# Altium PCB ESP8266.PcbDoc
Units mil, origin at the board's own origin, x right, y up, seen from the top; angles counter-clockwise.
Board outline 6000 x 4000 mil, 2 copper layers (Top Layer, Bottom Layer); 37 components, 27 nets, 194 pads, 10 vias.
Unrouted connection lines stored in the file: 56.
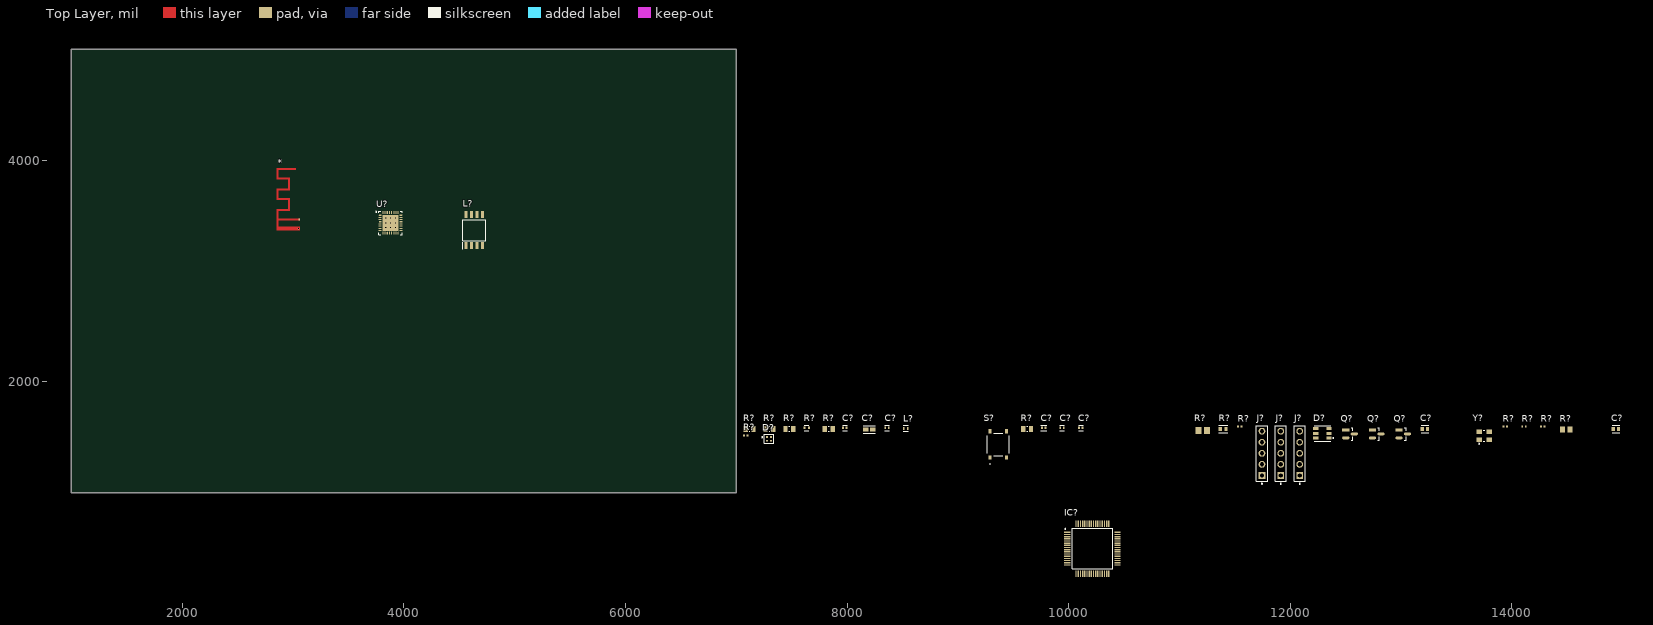
[diagram p0: Top Layer view]
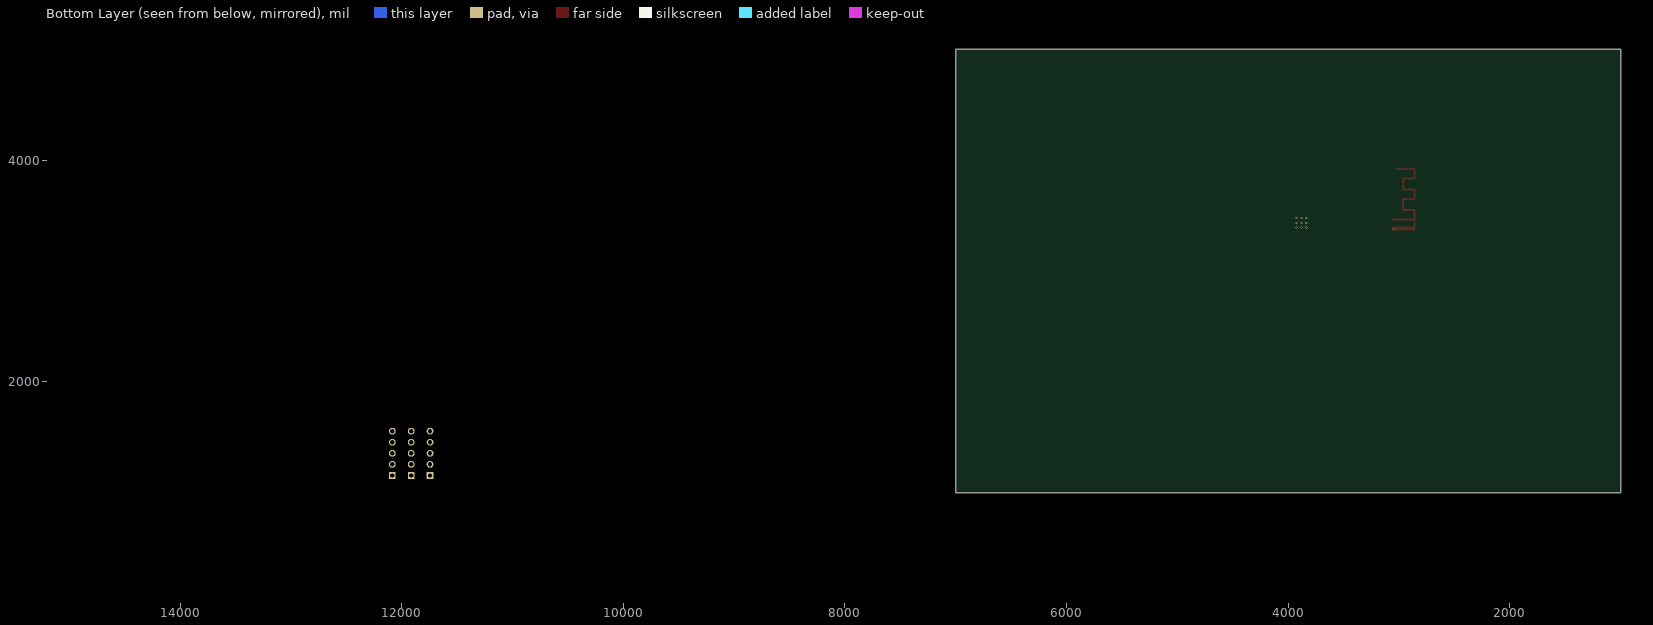
[diagram p1: Bottom Layer view, seen from below]

## Layer stack, top to bottom
Top Solder: solder mask 0.4, Solder Resist, Dk 3.5
Top Layer: signal copper 1.4
Dielectric 1: dielectric 12.6, FR-4, Dk 4.8
Bottom Layer: signal copper 1.4
Bottom Solder: solder mask 0.4, Solder Resist, Dk 3.5

## Board outline
1000,1000 7000,1000 7000,5000 1000,5000

## Design rules (kind name [scope] priority, off if disabled: settings)
Clearance [All] p1: gap=10 ignorepadtopadclearanceinfootprint=FALSE
PolygonConnect [All] p1: connectstyle=Relief reliefconductorwidth=10 reliefentries=4 polygonreliefangle="90 Angle" airgapwidth=10
RoutingVias [All] p1: holewidth=28 width=50 viastyle="Through Hole" minholewidth=28 minwidth=50 maxholewidth=28 maxwidth=50
SolderMaskExpansion [All] p1: expansion=4 istentingtop=FALSE
SupplyNets "Schematic Supply Nets_2" [InNet('+5')] p1: voltage=0.000
SupplyNets "Schematic Supply Nets_1" [InNet('+3,3')] p2: voltage=0.000
SupplyNets "Schematic Supply Nets" [InNet('GND')] p3: voltage=0.000
Width [All] p1: maxlimit=10 minlimit=10 preferedwidth=10
30 further rules are at their usual default settings.

## Classes and differential pairs
component class ESP8266: * D? IC? J? Q? R? S? U? Y?

## Components (designator, comment, footprint, x,y, rotation, side; value= is the part's Value field where it differs from the comment)
* "RF_ESP8266" PCBComponent_1 3049.52,3382.39 r90 top
C? "GRM155R71C104KA88D" FP-GRM15-MFG 7980,1585 r0 top value=0.10μF
C? "C0603C100C5GACTU" FP-C0603C-CF-MFG 13215,1575 r0 top value="10 pF"
C? "C0402C105K8PACTU" FP-C0402C105K8PACTU-MFG 9775,1585 r0 top
C? "GRM155R71C104KA88D" FP-GRM15-MFG 8360,1585 r0 top value=0.10μF
C? "C0603C100C5GACTU" FP-C0603C-CF-MFG 14940,1575 r0 top value="10 pF"
C? "GRM188R60J106ME47D" FP-GRM188-0_1-e0_2_0_55-IPC_A 8200,1570 r0 top
C? "GRM155R71C104KA88D" FP-GRM15-MFG 10110,1585 r0 top value=0.10μF
C? "GRM155R71C104KA88D" FP-GRM15-MFG 9940,1585 r0 top value=0.10μF
D? "SML-LX0404SIUPGUSB" FP-SML-LX0404SIUPGUSB-MFG 7295,1485 r0 top
D? "150353M153300" WL-SFTD_3535 12290,1535 r0 top
IC? "STM32H7A3RIT6" QFP50P1200X1200X160-64N 10215,495 r0 top
J? "90120-0125" FP-90120-0125-MFG 11745,1355 r90 top
J? "90120-0125" FP-90120-0125-MFG 11915,1355 r90 top
J? "90120-0125" FP-90120-0125-MFG 12085,1355 r90 top
L? "W25Q128JVSIQ_TR" SOIC127P780X195-8N 4635,3370 r90 top
L? "LQW15AN4N3C00D" FP-LQW15AN_00-W0_6-0_1-MFG 8530,1580 r0 top
Q? "MMBT2222A-7-F" FP-SOT23-IPC_A 12780,1530 r0 top
Q? "MMBT2222A-7-F" FP-SOT23-IPC_A 12540,1530 r0 top
Q? "MMBT2222A-7-F" FP-SOT23-IPC_A 13020,1530 r0 top
R? "ERJ-2GEJ221X" RESC1005X40X25LL05T05 7085,1515 r0 top
R? "RC0805FR-0710KL" RESC2013X60X35NL10T20 7835,1575 r0 top
R? "ERJ-3EKF2000V" FP-ERJ3EK-IPC_C 11395,1575 r0 top
R? "ERT-J0ET102J" RESC1005X40X25LL05T05 14110,1595 r0 top
R? "RC0805FR-0710KL" RESC2013X60X35NL10T20 7300,1575 r0 top
R? "ERT-J0ET102J" RESC1005X40X25LL05T05 14280,1595 r0 top
R? "ERJ-2RKF1000X" RESC1005X40X25LL05T05 11545,1595 r0 top
R? "ERJ6ENF1202V" RESC2013X70X40ML20T20 11210,1560 r0 top
R? "RC0805FR-0710KL" RESC2013X60X35NL10T20 7120,1575 r0 top
R? "ERJ6ENF2200V" RESC2013X70X40NL20T20 14490,1570 r0 top
R? "RC0805FR-0710KL" RESC2013X60X35NL10T20 7480,1575 r0 top
R? "ERT-J0ET102J" RESC1005X40X25LL05T05 13940,1595 r0 top
R? "RC0805FR-0710KL" RESC2013X60X35NL10T20 9625,1575 r0 top
R? "ERJ-2RKF4990X" FP-ERJ2RK-MFG 7635,1585 r0 top
S? "TS-1187A-B-A-B" TS1187ABAB 9365,1435 r90 top
U? "ESP8266EX" ESFS-QFN-32_L 3880,3435 r0 top
Y? "ABM8-26.000MHZ-B2-T" ABM810000MHZ12D2W 13750,1515 r0 top

## Footprints (in the part's own frame and the unit in brackets; to place one, negate y for a bottom-side part, rotate by r counter-clockwise, add the part's x,y. Pads: shape width x height; smd on the part's side, far side on the other; paste and mask are expansions set on the pad)
ABM810000MHZ12D2W [mm]
  rect 1.3x1.05 smd: 1(-1.15,-0.925) 2(1.15,-0.925) 3(1.15,0.925) 4(-1.15,0.925)
  silkscreen extent -1.25,-1.95 0.2,1.25, body extent -1.6,-1.25 1.6,1.25, height 0.8
ESFS-QFN-32_L [mm] "QFN, 32-Leads, Body 5.05x5.05mm, Pitch 0.50mm, Thermal Pad 3.70x3.70mm, IPC High Density"
  oval 0.7x0.25 smd: 1(-2.375,1.75) 2(-2.375,1.25) 3(-2.375,0.75) 4(-2.375,0.25) 5(-2.375,-0.25) 6(-2.375,-0.75) 7(-2.375,-1.25) 8(-2.375,-1.75) 17(2.375,-1.75) 18(2.375,-1.25) 19(2.375,-0.75) 20(2.375,-0.25) 21(2.375,0.25) 22(2.375,0.75) 23(2.375,1.25) 24(2.375,1.75)
  oval 0.25x0.7 smd: 9(-1.75,-2.375) 10(-1.25,-2.375) 11(-0.75,-2.375) 12(-0.25,-2.375) 13(0.25,-2.375) 14(0.75,-2.375) 15(1.25,-2.375) 16(1.75,-2.375) 25(1.75,2.375) 26(1.25,2.375) 27(0.75,2.375) 28(0.25,2.375) 29(-0.25,2.375) 30(-0.75,2.375) 31(-1.25,2.375) 32(-1.75,2.375)
  rect 3.7x3.7 smd: 33(0,0)
  silkscreen extent -3.45,-2.67 2.68,2.68, body extent -2.52,-2.52 2.53,2.53, height 0.9
FP-90120-0125-MFG [mm]
  rect 1.55x1.55 hole 1 paste-2539.97 mask+0: 1(-5.08,0)
  round 1.55 hole 1 paste-2539.97 mask+0: 2(-2.54,0) 3(0,0) 4(2.54,0) 5(5.08,0)
  silkscreen extent -7.07,-1.27 6.35,1.27, body extent -6.45,-1.37 6.45,1.37, height 0.25
FP-C0402C105K8PACTU-MFG [mm]
  rect 0.52x0.52 smd paste+0 mask+0: 1(-0.4,0) 2(0.4,0)
  silkscreen extent -0.67,-0.64 0.67,0.64, body extent -0.8,-0.4 0.8,0.4, height 0.25
FP-C0603C-CF-MFG [mm]
  rect 0.75x0.9 smd paste+0 mask+0: 1(-0.6,0) 2(0.6,0)
  silkscreen extent -0.87,-0.85 0.88,0.85, body extent -1.2,-0.6 1.2,0.6, height 0.25
FP-ERJ2RK-MFG [mm]
  rect 0.475x0.5 smd paste+0 mask+0: 1(-0.513,0) 2(0.513,0)
  silkscreen extent -0.53,-0.63 0.53,0.63, body extent -0.85,-0.38 0.85,0.38, height 0.25
FP-ERJ3EK-IPC_C [mil]
  rect 29.78x33.94 smd paste+0 mask+0: 1(-25.62,0) 2(25.62,0)
  silkscreen extent -41,-34 41,34, body extent -44,-23 44,23, height 10
FP-GRM15-MFG [mm]
  rect 0.4x0.5 smd paste+0 mask+0: 1(-0.4,0) 2(0.4,0)
  silkscreen extent -0.53,-0.63 0.53,0.63, body extent -0.7,-0.38 0.7,0.38, height 0.25
FP-GRM188-0_1-e0_2_0_55-IPC_A [mil]
  rect 47.57x39.85 smd paste+0 mask+0: 1(-31.57,0) 2(31.57,0)
  silkscreen extent -55,-36 55,36, body extent -75,-40 75,40, height 10
FP-LQW15AN_00-W0_6-0_1-MFG [mm]
  rect 0.35x0.65 smd paste+0 mask+0: 1(-0.425,0) 2(0.425,0)
  silkscreen extent -0.55,-0.7 0.55,0.7, body extent -0.7,-0.45 0.7,0.45, height 0.25
FP-SML-LX0404SIUPGUSB-MFG [mm]
  rect 0.45x0.45 smd paste+0 mask+0: 1(-0.425,0.425) 2(0.425,0.425) 3(0.425,-0.425) 4(-0.425,-0.425)
  silkscreen extent -1.67,-1.05 1.05,1.05, body extent -0.85,-0.85 0.85,0.85, height 0.25
FP-SOT23-IPC_A [mm]
  rect 1.659x0.627 smd paste+0 mask+0: 1(-0.977,0.915)
  rrect100% 1.659x0.627 smd paste+0 mask+0: 2(-0.977,-0.915) 3(0.977,0)
  silkscreen extent 0.23,-1.45 0.65,1.45, body extent -2.31,-1.95 2.31,1.95, height 0.25
PCBComponent_1 [mil]
  rect 19.7x15 smd: 5(82.61,-5.48)
  Top Layer region: 72.8,-12.9 92.5,-12.9 92.5,180 72.8,180
  Top Layer region: 529.2,24.8 548.9,24.8 548.9,180 529.2,180
  Top Layer region: 442.6,180 548.9,180 548.9,199.7 442.6,199.7
  Top Layer region: 442.6,76.1 462.3,76.1 462.3,180 442.6,180
  Top Layer region: 363.9,76.1 442.6,76.1 442.6,95.8 363.9,95.8
  Top Layer region: 344.2,76.1 363.9,76.1 363.9,180 344.2,180
  Top Layer region: 257.6,180 363.9,180 363.9,199.7 257.6,199.7
  Top Layer region: 257.6,76.1 277.3,76.1 277.3,180 257.6,180
  Top Layer region: 159.2,76.1 178.9,76.1 178.9,180 159.2,180
  Top Layer region: 178.9,76.1 257.6,76.1 257.6,95.8 178.9,95.8
  Top Layer region: -17.7,180 178.9,180 178.9,199.7 -17.7,199.7
  Top Layer region: -17.7,-12.9 17.7,-12.9 17.7,180 -17.7,180
QFP50P1200X1200X160-64N [mm]
  rect 1.475x0.3 smd: 1(-5.738,3.75) 2(-5.738,3.25) 3(-5.738,2.75) 4(-5.738,2.25) 5(-5.738,1.75) 6(-5.738,1.25) 7(-5.738,0.75) 8(-5.738,0.25) 9(-5.738,-0.25) 10(-5.738,-0.75) 11(-5.738,-1.25) 12(-5.738,-1.75) 13(-5.738,-2.25) 14(-5.738,-2.75) 15(-5.738,-3.25) 16(-5.738,-3.75) 33(5.738,-3.75) 34(5.738,-3.25) 35(5.738,-2.75) 36(5.738,-2.25) 37(5.738,-1.75) 38(5.738,-1.25) 39(5.738,-0.75) 40(5.738,-0.25) 41(5.738,0.25) 42(5.738,0.75) 43(5.738,1.25) 44(5.738,1.75) 45(5.738,2.25) 46(5.738,2.75) 47(5.738,3.25) 48(5.738,3.75)
  rect 0.3x1.475 smd: 17(-3.75,-5.738) 18(-3.25,-5.738) 19(-2.75,-5.738) 20(-2.25,-5.738) 21(-1.75,-5.738) 22(-1.25,-5.738) 23(-0.75,-5.738) 24(-0.25,-5.738) 25(0.25,-5.738) 26(0.75,-5.738) 27(1.25,-5.738) 28(1.75,-5.738) 29(2.25,-5.738) 30(2.75,-5.738) 31(3.25,-5.738) 32(3.75,-5.738) 49(3.75,5.738) 50(3.25,5.738) 51(2.75,5.738) 52(2.25,5.738) 53(1.75,5.738) 54(1.25,5.738) 55(0.75,5.738) 56(0.25,5.738) 57(-0.25,5.738) 58(-0.75,5.738) 59(-1.25,5.738) 60(-1.75,5.738) 61(-2.25,5.738) 62(-2.75,5.738) 63(-3.25,5.738) 64(-3.75,5.738)
  silkscreen extent -6.35,-4.65 4.65,4.65, body extent -6,-6 6,6, height 1.6
RESC1005X40X25LL05T05 [mm] "Chip Resistor, 2-Leads, Body 1.05x0.55mm, IPC High Density"
  rect 0.45x0.45 smd: 1(-0.4,0) 2(0.4,0)
  body extent -0.53,-0.28 0.53,0.28, height 0.4
RESC2013X60X35NL10T20 [mm] "Chip Resistor, 2-Leads, Body 2.1x1.35mm, IPC Medium Density"
  rect 1x1.35 smd: 1(-0.9,0) 2(0.9,0)
  silkscreen extent -0.1,-0.58 0.1,0.58, body extent -1.05,-0.68 1.05,0.67, height 0.6
RESC2013X70X40ML20T20 [mm] "Chip Resistor, 2-Leads, Body 2.00x1.25mm, IPC Low Density"
  rect 1.35x1.55 smd: 1(-0.975,0) 2(0.975,0)
  body extent -1.1,-0.72 1.1,0.72, height 0.7
RESC2013X70X40NL20T20 [mm] "Chip Resistor, 2-Leads, Body 2.00x1.25mm, IPC Medium Density"
  rect 1.15x1.45 smd: 1(-0.875,0) 2(0.875,0)
  body extent -1.1,-0.72 1.1,0.72, height 0.7
SOIC127P780X195-8N [mm]
  rect 1.6x0.65 smd: 1(-3.55,1.905) 2(-3.55,0.635) 3(-3.55,-0.635) 4(-3.55,-1.905) 5(3.55,-1.905) 6(3.55,-0.635) 7(3.55,0.635) 8(3.55,1.905)
  silkscreen extent -4.35,-2.62 2.4,2.62, body extent -3.9,-2.62 3.9,2.62, height 1.95
TS1187ABAB [mm]
  rect 1x0.75 smd: A1(-3,1.875) B1(3,1.875) C1(-3,-1.875) D1(3,-1.875)
  silkscreen extent -4.5,-2.55 2.55,2.55, body extent -3.2,-2.55 3.3,2.55, height 1.5
WL-SFTD_3535 [mm] "SMD Full-color Top LED Diffused, body 3.7x3.5mm"
  rect 1.2x0.7 smd: 1(-1.5,1.075) 2(1.5,1.075) 3(-1.5,0) 4(1.5,0) 5(-1.5,-1.075) 6(1.5,-1.075)
  silkscreen extent -1.9,-1.8 2.63,1.8, body extent -1.85,-1.75 1.85,1.75, height 2.8

## Part data
*: library part CMP-00025-00004-2
C? C? C? C?: library part CMP-2100-03641-2, "CAP CER 0.1UF 16V X7R 0402", Capacitance=0.10μF, Manufacturer=Murata, Package=GRM15, Temperature="-55°C to +125°C", Temperature Characteristic=X7R, Temperature Range High=+125°C, Temperature Range Low=-55°C, Tolerance=10%, Voltage Rating=16Vdc, Category=Cap, ComponentLink2Description=Datasheet, ComponentLink2URL=https://search.murata.co.jp/Ceramy/image/img/A01X/G101/ENG/GRM155R71H471KA01-01A.pdf, Device Class L1="Passive Components", Device Class L2=Capacitors, Device Class L3="Ceramic Capacitors", Digikey Description="CAP CER 0.1UF 16V X7R 0402", Height=0.55mm, Ipc Land Pattern Name=CAPC10050X219, Lead Free=yes, Manufacturer Part Number=GRM155R71C104KA88D, Material=Ceramic, Mouser Description="0402 0.1 uF 16V ±10 % Tolerance X7R SMT Multilayer Ceramic Capacitor", Octopart=https://octopart.com/grm155r71c104ka88d-murata-196880, RoHS=TRUE, Standoff Height=0mm
C? C?: library part CMP-2006-03343-2, "CAP CER 10PF 50V NP0 0603", Capacitance="10 pF", Manufacturer=KEMET, Package=C0603C-CF, Temperature="-55°C to +125°C", Temperature Characteristic=C0G, Temperature Coefficient=30ppm/°C, Temperature Range High=+125°C, Temperature Range Low=-55°C, Tolerance="0.25 pF", Voltage Rating="50 V", Automotive=Yes, Automotive Grade="Grade 1", Category=Cap, ComponentLink2Description=Datasheet, ComponentLink2URL=https://api.kemet.com/component-edge/download/datasheet/C0603C100J5GACAUTO.pdf, Device Class L1="Passive Components", Device Class L2=Capacitors, Device Class L3="Ceramic Capacitors", Digikey Description="CAP CER 10PF 50V NP0 0603", Height=0.87mm, Lead Free=Yes, Manufacturer Part Number=C0603C100C5GACTU, Material=Ceramic, Mouser Description="Multilayer Ceramic Capacitors MLCC - SMD/SMT 50volts 10pF C0G 0.25%", Octopart=https://octopart.com/c0603c100c5gactu-kemet-9138556, RoHS=TRUE
C?: library part CMP-2008-02081-2, "CAP CER 1UF 10V X5R 0402", Capacitance=1uF, Case Code (Imperial)=0402, Case Code (Metric)=1005, Dielectric=X5R, Dielectric Material=Ceramic, Max Operating Temperature=85°C, Min Operating Temperature=-55°C, Package Quantity=1, Tolerance=10%, Voltage=10V, Case/Package=0402, Construction=Flat, Contact Plating=Tin, Depth=0.5mm, Dissipation Factor=5%, Height=0.5mm, Lead Free="Lead Free", Length=1mm, Mount="Surface Mount", Number of Pins=2, Packaging="Tape and Reel", Radiation Hardening=No, REACH SVHC="No SVHC", RoHS Compliant=Yes, Series=C, Termination=SMD/SMT, Thickness=0.022inch, Voltage Rating=10V, Voltage Rating (DC)=10V, Width=0.5mm
C?: library part CMP-2006-02792-2, "Chip Multilayer Ceramic Capacitors for General Purpose, 0603, 10uF, X5R, 15%, 20%, 6.3V", Capacitance=10uF, Case Code (Imperial)=0603, Case Code (Metric)=1608, Dielectric=X5R, Max Operating Temperature=85°C, Min Operating Temperature=-55°C, Package Quantity=4000, Tolerance=20%, Voltage=6.3V, Case/Package=0603, Depth=0.8mm, Height=0.8mm, Lead Free="Lead Free", Length=1.6mm, Material=Ceramic, Mount="Surface Mount", Packaging="Tape and Reel", Radiation Hardening=No, REACH SVHC="No SVHC", Termination=SMD/SMT, Thickness=0.035inch, Voltage Rating=6.3V, Voltage Rating (DC)=6.3V, Width=0.031inch
D?: library part CMP-2000-07119-2, "LED RGB CLEAR SMD", Case Code (Imperial)=0404, Case Code (Metric)=1010, Color=Blue, Forward Current=2mA, Forward Voltage=2.73V, Lens Color=Colorless, Max Operating Temperature=85°C, Min Operating Temperature=-40°C, Package Quantity=2000, Power Rating=30mW, Case/Package=0404, Height=0.3mm, Lead Free="Lead Free", Length=1mm, Lens Style=Square, Lens Transparency=Clear, Luminous Intensity=20mcd, Mount="Surface Mount", Number of LEDs=3, Packaging="Tape and Reel", REACH SVHC="No SVHC", Test Current=2mA, Viewing Angle=120°, Wavelength=465nm, Width=1mm
D?: library part CMP-03913-90235584-1, "150353M153300 WL-SFTD SMT Full-color Top LED Diffused", Color="Blue, Green, Red", Forward Current=100mA, Forward Voltage=2V, Max Junction Temperature (Tj)=90°C, Max Operating Temperature=85°C, Max Reverse Voltage (DC)=5V, Min Operating Temperature=-40°C, Power Dissipation=75mW, Dominant Wavelength=520nm, Height=2.8mm, Length=3.7mm, Luminous Intensity=400mcd, NexarPartId=90235584, Packaging="Tape and Reel", Peak Wavelength=465nm, Reverse Voltage=5V, RoHS=Compliant, Viewing Angle=120°, Width=3.5mm
IC?: "Integrated Circuit", Manufacturer_Name=STMicroelectronics, Mouser Part Number=511-STM32H7A3RIT6, Arrow Part Number=STM32H7A3RIT6, Arrow Price/Stock=https://www.arrow.com/en/products/stm32h7a3rit6/stmicroelectronics, Datasheet Link=https://www.st.com/resource/en/datasheet/stm32h7a3ai.pdf, Height=1.6mm, Manufacturer_Part_Number=STM32H7A3RIT6, Mouser Price/Stock=https://www.mouser.co.uk/ProductDetail/STMicroelectronics/STM32H7A3RIT6?qs=xZ%2FP%252Ba9zWqZAEQXxnLVEdg%3D%3D
J? J? J?: library part CMP-00257-00655425-1, "90120-0125 2.54mm Pitch C-Grid III Header, Single Row, Vertical, 5 Circuits, Tin (Sn) Plating", Contact Resistance=20mΩ, Current Rating=3A, Housing Color=Black, Manufacturer Lifecycle Status=ACTIVE, Max Operating Temperature=125°C, Max Voltage Rating (DC)=350.35kV, Min Operating Temperature=-55°C, Voltage Rating=350V, Contact Gender=Male, Contact Material=Brass, Contact Plating=Tin, Country of Origin=SK, Gender=Male, Glow Wire Compliant=Non-compliant, Housing Material=Polyester, Lead Free="Lead Free", Lead Length=2.9mm, Lead Pitch=2.54mm, Lifecycle Status=Production, Mating Post Length=6.75mm, Mount="Through Hole", NexarPartId=655425, Number of Circuits=5, Number of Contacts=5, Number of Pins=5, Number of Positions=5, Number of Rows=1, Orientation=Vertical, Packaging=Bulk, Pitch=2.54mm, Plating=Tin, Radiation Hardening=No, REACH SVHC="No SVHC", RoHS=Compliant, Schedule B=8536694040, Termination=Solder, Voltage Rating (AC)=350V
L?: "Inductor", Arrow Part Number="W25Q128JVSIQ TR", Manufacturer_Name=Winbond, Mouser Part Number=454-W25Q128JVSIQTR, Arrow Price/Stock=https://www.arrow.com/en/products/w25q128jvsiqtr/winbond-electronics?utm_currency=USD&region=nac, Datasheet Link=http://www.winbond.com/resource-files/w25q128jv%20spi%20revc%2011162016.pdf, Height=1.95mm, Manufacturer_Part_Number="W25Q128JVSIQ TR", Mouser Price/Stock=https://www.mouser.co.uk/ProductDetail/Winbond/W25Q128JVSIQ-TR?qs=qSfuJ%252Bfl%2Fd7vTyLA9kNdGw%3D%3D
L?: library part CMP-06042-007148-1, "Wire Wound RF Inductor 4.3nH ±0.2nH 750mA 0.07Ω 0402 (1005)", Case Code (Imperial)=0402, Case Code (Metric)=1005, Current Rating=750mA, DC Resistance (DCR)=70mR, Inductance=4.3nH, Max Operating Temperature=125°C, Min Operating Temperature=-55°C, Package Quantity=10000, Self Resonant Frequency=10GHz, Test Frequency=100MHz, Case/Package=0402, Core Material=Air, DC Current=750mA, Depth=0.7mm, Height=0.5mm, Lead Free="Lead Free", Length=1mm, Max DC Current=750mA, Military Standard=Not, Mount="Surface Mount", Number of Pins=2, Packaging="Tape and Reel", Q Factor=25, Radiation Hardening=No, REACH SVHC="No SVHC", Shielding=Unshielded, Termination=SMD/SMT, Weight=2.8E-05oz, Width=0.02inch
Q? Q? Q?: library part CMP-1693-00003-4, "TRANS NPN 40V 0.6A SMD SOT23-3", Case/Package=SOT-23, Collector Base Voltage (VCBO)=75V, Collector Emitter Breakdown Voltage=40V, Collector Emitter Saturation Voltage=1V, Continuous Collector Current=600mA, Current=1A, Emitter Base Voltage (VEBO)=6V, Frequency=300MHz, Max Operating Temperature=150°C, Max Power Dissipation=300mW, Min Operating Temperature=-55°C, Package Quantity=3000, Power Dissipation=350mW, Collector Emitter Voltage (VCEO)=40V, Contact Plating=Tin, Current Rating=600mA, Element Configuration=Single, Gain Bandwidth Product=300MHz, Height=1mm, hFE Min=100, Lead Free="Lead Free", Length=3.05mm, Max Breakdown Voltage=40V, Max Collector Current=600mA, Max Frequency=300MHz, Mount="Surface Mount", Number of Elements=1, Number of Pins=3, Packaging="Tape and Reel", Polarity=NPN, Radiation Hardening=No, REACH SVHC="No SVHC", Termination=SMD/SMT, Transition Frequency=300MHz, Voltage=40V, Voltage Rating (DC)=40V, Weight=0.000282oz, Width=1.4mm
R?: library part CMP-2002-00487-3, "Chip Resistor, 220 Ohm, +/- 5%, 100 mW, -55 to 155 degC, 0402 (1005 Metric), RoHS, Tape and Reel", Case Code (Imperial)=0402, Case Code (Metric)=1005, Manufacturer="Basic Passives", Max Operating Temperature="155 degC", Min Operating Temperature="-55 degC", Package Quantity=10000, Power Rating="100 mW", Resistance="220 Ohm", Tolerance=5%, Voltage Rating="50 V", Case\/Package=0402, ComponentLink1Description="Manufacturer URL", ComponentLink1URL=http://www.panasonic.com/, ComponentLink2Description=Datasheet, ComponentLink2URL=http://industrial.panasonic.com/cdbs/www-data/pdf/RDA0000/AOA0000C84.pdf, DatasheetVersion=04/2015, Height="0.35 mm", Length="1 mm", Mount="Surface Mount", Mounting Technology="Surface Mount", PackageDescription="2-Pin Surface Mount Device, Body 1 x 0.5 mm", PackageReference=0402, Packaging="Tape and Reel", PartNumber=ERJ-2GEJ221X, Pins=2, Radiation Hardening=No, REACH SVHC=Unknown, RoHSCompliant=true, Width="0.5 mm"
R? R? R? R? R?: library part CMP-1659-00013-4, "Chip Resistor, 10 KOhm, +/- 1%, 0.125 W, -55 to 155 degC, 0805 (2012 Metric), RoHS, Tape and Reel", Manufacturer=Yageo, Max Operating Temperature="155 degC", Min Operating Temperature="-55 degC", Package Quantity=5000, Voltage Rating="150 V", ComponentLink1Description="Manufacturer URL", ComponentLink1URL=http://www.yageo.com/, ComponentLink2Description=Datasheet, ComponentLink2URL=http://www.yageo.com/documents/recent/PYu-RC_Group_51_RoHS_L_04.pdf, DatasheetVersion="Rev. 4, 02/2016", Height="0.5 mm", Length="2 mm", Mount="Surface Mount", Mounting Technology="Surface Mount", PackageDescription="2-Pin Surface Mounted Device, Body 2 x 1.25 mm", PackageReference=0805, Packaging="Tape and Reel", Pins=2, REACH SVHC="No SVHC", RoHSCompliant=true
R?: library part CMP-2000-00316-2, "RES SMD 200 OHM 1% 1/10W 0603", Case Code (Imperial)=0603, Case Code (Metric)=1608, Max Operating Temperature=155°C, Max Power Dissipation=100mW, Min Operating Temperature=-55°C, Package Quantity=1, Resistance=200R, Resistance Tolerance=1%, Resistor Type="Thick Film", Temperature Coefficient=100ppm/°C, Voltage Rating=75V, Voltage Rating (DC)=50V, Case/Package=0603, Construction=Rectangular, Contact Plating=Tin, Depth=0.8mm, Features="Automotive AEC-Q200", Height=0.022inch, Lead Free="Lead Free", Length=1.6mm, Military Standard=Not, Mount="Surface Mount", Number of Terminations=2, Packaging="Tape and Reel", Power Rating=100mW, Radiation Hardening=No, REACH SVHC="No SVHC", RoHS Compliant=Yes, Series=ERJ, Technology="THICK FILM", Termination=SMD/SMT, Tolerance=1%, Width=0.031inch, Working Voltage=75V
R? R? R?: library part CMP-2002-01184-1, Manufacturer=Panasonic, Part Number=ERT-J0ET102J
R?: library part CMP-2002-00605-3, "Chip Resistor, 100 Ohm, +/- 1%, 100 mW, -55 to 155 degC, 0402 (1005 Metric), RoHS, Tape and Reel", Case Code (Imperial)=0402, Case Code (Metric)=1005, Manufacturer="Basic Passives", Max Operating Temperature="155 degC", Min Operating Temperature="-55 degC", Package Quantity=10000, Power Rating="100 mW", Resistance="100 Ohm", Tolerance=1%, Voltage Rating="50 V", Case\/Package=0402, ComponentLink1Description="Manufacturer URL", ComponentLink1URL=http://www.panasonic.com/, ComponentLink2Description=Datasheet, ComponentLink2URL=http://industrial.panasonic.com/cdbs/www-data/pdf/RDA0000/AOA0000C86.pdf, DatasheetVersion=04/2015, Height="0.35 mm", Length="1 mm", Mount="Surface Mount", Mounting Technology="Surface Mount", PackageDescription="2-Pin Surface Mount Device, Body 1 x 0.5 mm", PackageReference=0402, Packaging="Tape and Reel", PartNumber=ERJ-2RKF1000X, Pins=2, Radiation Hardening=No, REACH SVHC=Yes, RoHSCompliant=true, Width="0.5 mm"
R?: library part CMP-2001-00513-1, Manufacturer=Panasonic, Part Number=ERJ6ENF1202V
R?: library part CMP-2001-00044-1, Manufacturer=Panasonic, Part Number=ERJ6ENF2200V
R?: library part CMP-2002-00965-2, "RES SMD 499 OHM 1% 1/10W 0402", Case Code (Imperial)=0402, Case Code (Metric)=1005, Max Operating Temperature=155°C, Max Power Dissipation=100mW, Min Operating Temperature=-55°C, Package Quantity=1, Resistance=499R, Resistance Tolerance=1%, Resistor Type="Thick Film", Temperature Coefficient=100ppm/°C, Voltage Rating=50V, Case/Package=0402, Construction=Rectangular, Contact Plating=Tin, Depth=0.5mm, Features="Automotive AEC-Q200", Height=0.35mm, Lead Free="Lead Free", Length=1mm, Military Standard=Not, Mount="Surface Mount", Number of Terminations=2, Packaging="Tape and Reel", Power Rating=100mW, REACH SVHC="No SVHC", RoHS Compliant=Yes, Series=ERJ, Size Code=0402, Technology="THICK FILM", Termination=SMD/SMT, Tolerance=1%, Voltage Rating (DC)=50V, Width=0.02inch
S?: "Switch", Manufacturer_Name="XKB Connectivity", Datasheet Link=http://www.helloxkb.com/public/images/pdf/TS-1187A-X-X-X.pdf, Height=4.05mm, Manufacturer_Part_Number=TS-1187A-B-A-B
U?: library part CMP-2000-07453-1, "Low-Power, Highly-Integrated Wi-Fi Solution, 2.5 to 3.6 V, 80 mA, -40 to 125 degC, 32-Pin QFN", Manufacturer="Espressif Systems", Package Description="32-Pin Quad Falt No-Lead, Body 5 x 5 mm, Pitch 0.5 mm", Package Reference=QFN-32, Datasheet URL=http://espressif.com/sites/default/files/documentation/0a-esp8266ex_datasheet_en.pdf, Datasheet Version="Rev. 5.4, 04/2017", Manufacturer URL=http://espressif.com, Mounting Technology=SurfaceMount
Y?: "Crystal or Oscillator", Manufacturer_Name=ABRACON, Datasheet Link=https://abracon.com/Resonators/abm8.pdf, Height=0.8mm, Manufacturer_Part_Number=ABM8-26.000MHZ-B2-T

## Via types
v1: diameter 19.68, hole 7.87, Top Layer to Bottom Layer, 9 vias
v2: diameter 15, hole 10, Top Layer to Bottom Layer, 1 vias

## Nets (pads, with @x,y where several pads share a name; then routed paths per layer and width w, separated by ;. In a path a pad name is that pad's centre, name@x,y a point inside that pad or via, vN(x,y) a via of type N, cw(c..) or ccw(c..) an arc to the next point about the centre after c; other vN are vias at no path point)
+3,3: C?.1@8168.43,1570 C?.1@9759.25,1585 C?.2@8375.75,1585 C?.2@9955.75,1585 C?.2@10125.75,1585 L?.1@8513.27,1580 L?.8 Q?.3 R?.2@7870.43,1575 R?.2@9660.43,1575 U?.29 U?.30
+5: D?.1@7278.27,1501.73
GND: C?.1@8344.25,1585 C?.1@9924.25,1585 C?.1@10094.25,1585 C?.2@8231.57,1570 C?.2@9790.75,1585 C?.2@13238.62,1575 C?.2@14963.62,1575 D?.4@12349.06,1535 D?.6 L?.4 R?.1@7444.57,1575 R?.1@11171.61,1560 R?.2@11560.75,1595 S?.C1 U?.33 Y?.2 Y?.4
  other v1: 3836.69,3391.69 3880,3391.69 3923.31,3391.69 3836.69,3435 3880,3435 3923.31,3435 3836.69,3478.31 3880,3478.31 3923.31,3478.31
NetC?_1: C?.1@13191.38,1575 U?.28 Y?.1
NetC?_2: C?.2@7995.75,1585 L?.2@8546.73,1580 U?.2 U?.4
NetD?_1: D?.1@12230.94,1577.32 Q?.2@12501.55,1493.98
NetD?_2: D?.2@12349.06,1577.32 R?.1@11529.25,1595
NetD?_3: D?.3@12230.94,1535 Q?.2@12981.55,1493.98
NetD?_4: D?.4@7278.27,1468.27 R?.1@7069.25,1515
NetD?_5: D?.5 Q?.2@12741.55,1493.98
NetJ?_1: J?.1@11915,1155 U?.1
NetJ?_2: J?.2@11915,1255 U?.17
NetJ?_3: J?.3@11915,1355 U?.15
NetJ?_4: J?.4@11745,1455 U?.8
NetJ?_5: J?.5@11745,1555 U?.32
NetL?_1: L?.1@4560,3230.24 U?.20
NetL?_2: L?.2@4610,3230.24 U?.22
NetL?_3: L?.3 L?.5 U?.19 U?.23
NetL?_6: L?.6 R?.1@14455.55,1570
NetL?_7: L?.7 U?.18
NetQ?_1: Q?.1@12501.55,1566.02 R?.2@13955.75,1595
NetR?_1: R?.1@11369.38,1575 R?.2@14524.45,1570 U?.14
NetR?_2: R?.2@7515.43,1575 R?.2@7655.18,1585
NetS?_A1: S?.A1 U?.7
NetU?_3: U?.3
NetU?_5: U?.5
NetU?_24: U?.24
pads on no net: *.5 C?.1@7964.25,1585 C?.1@14916.38,1575 D?.2@7311.73,1501.73 D?.3@7311.73,1468.27 IC?.1 IC?.2 IC?.3 IC?.4 IC?.5 IC?.6 IC?.7 IC?.8 IC?.9 IC?.10 IC?.11 IC?.12 IC?.13 IC?.14 IC?.15 IC?.16 IC?.17 IC?.18 IC?.19 IC?.20 IC?.21 IC?.22 IC?.23 IC?.24 IC?.25 IC?.26 IC?.27 IC?.28 IC?.29 IC?.30 IC?.31 IC?.32 IC?.33 IC?.34 IC?.35 IC?.36 IC?.37 IC?.38 IC?.39 IC?.40 IC?.41 IC?.42 IC?.43 IC?.44 IC?.45 IC?.46 IC?.47 IC?.48 IC?.49 IC?.50 IC?.51 IC?.52 IC?.53 IC?.54 IC?.55 IC?.56 IC?.57 IC?.58 IC?.59 IC?.60 IC?.61 IC?.62 IC?.63 IC?.64 J?.1@11745,1155 J?.1@12085,1155 J?.2@11745,1255 J?.2@12085,1255 J?.3@11745,1355 J?.3@12085,1355 J?.4@11915,1455 J?.4@12085,1455 J?.5@11915,1555 J?.5@12085,1555 Q?.1@12741.55,1566.02 Q?.1@12981.55,1566.02 R?.1@7084.57,1575 R?.1@7264.57,1575 R?.1@7614.82,1585 R?.1@7799.57,1575 R?.1@9589.57,1575 R?.1@13924.25,1595 R?.1@14094.25,1595 R?.1@14264.25,1595 R?.2@7100.75,1515 R?.2@7155.43,1575 R?.2@7335.43,1575 R?.2@11248.39,1560 R?.2@11420.62,1575 R?.2@14125.75,1595 R?.2@14295.75,1595 S?.B1 S?.D1 U?.6 U?.9 U?.10 U?.11 U?.12 U?.13 U?.16 U?.21 U?.25 U?.26 U?.27 U?.31 Y?.3
copper on no net:
  other v2: 3049.52,3382.39